# Altium PCB panel.PcbDoc
Units mm, origin at the board's own origin, x right, y up, seen from the top; angles counter-clockwise.
Board outline 201.75 x 192 mm, 4 copper layers (Top Layer - RF, (Inserted) MidLayer2 - GND, (Inserted) MidLayer3 - POWER, Bottom Layer), stack 1.569 mm thick; 3 components, 0 nets, 5 pads, 0 vias.
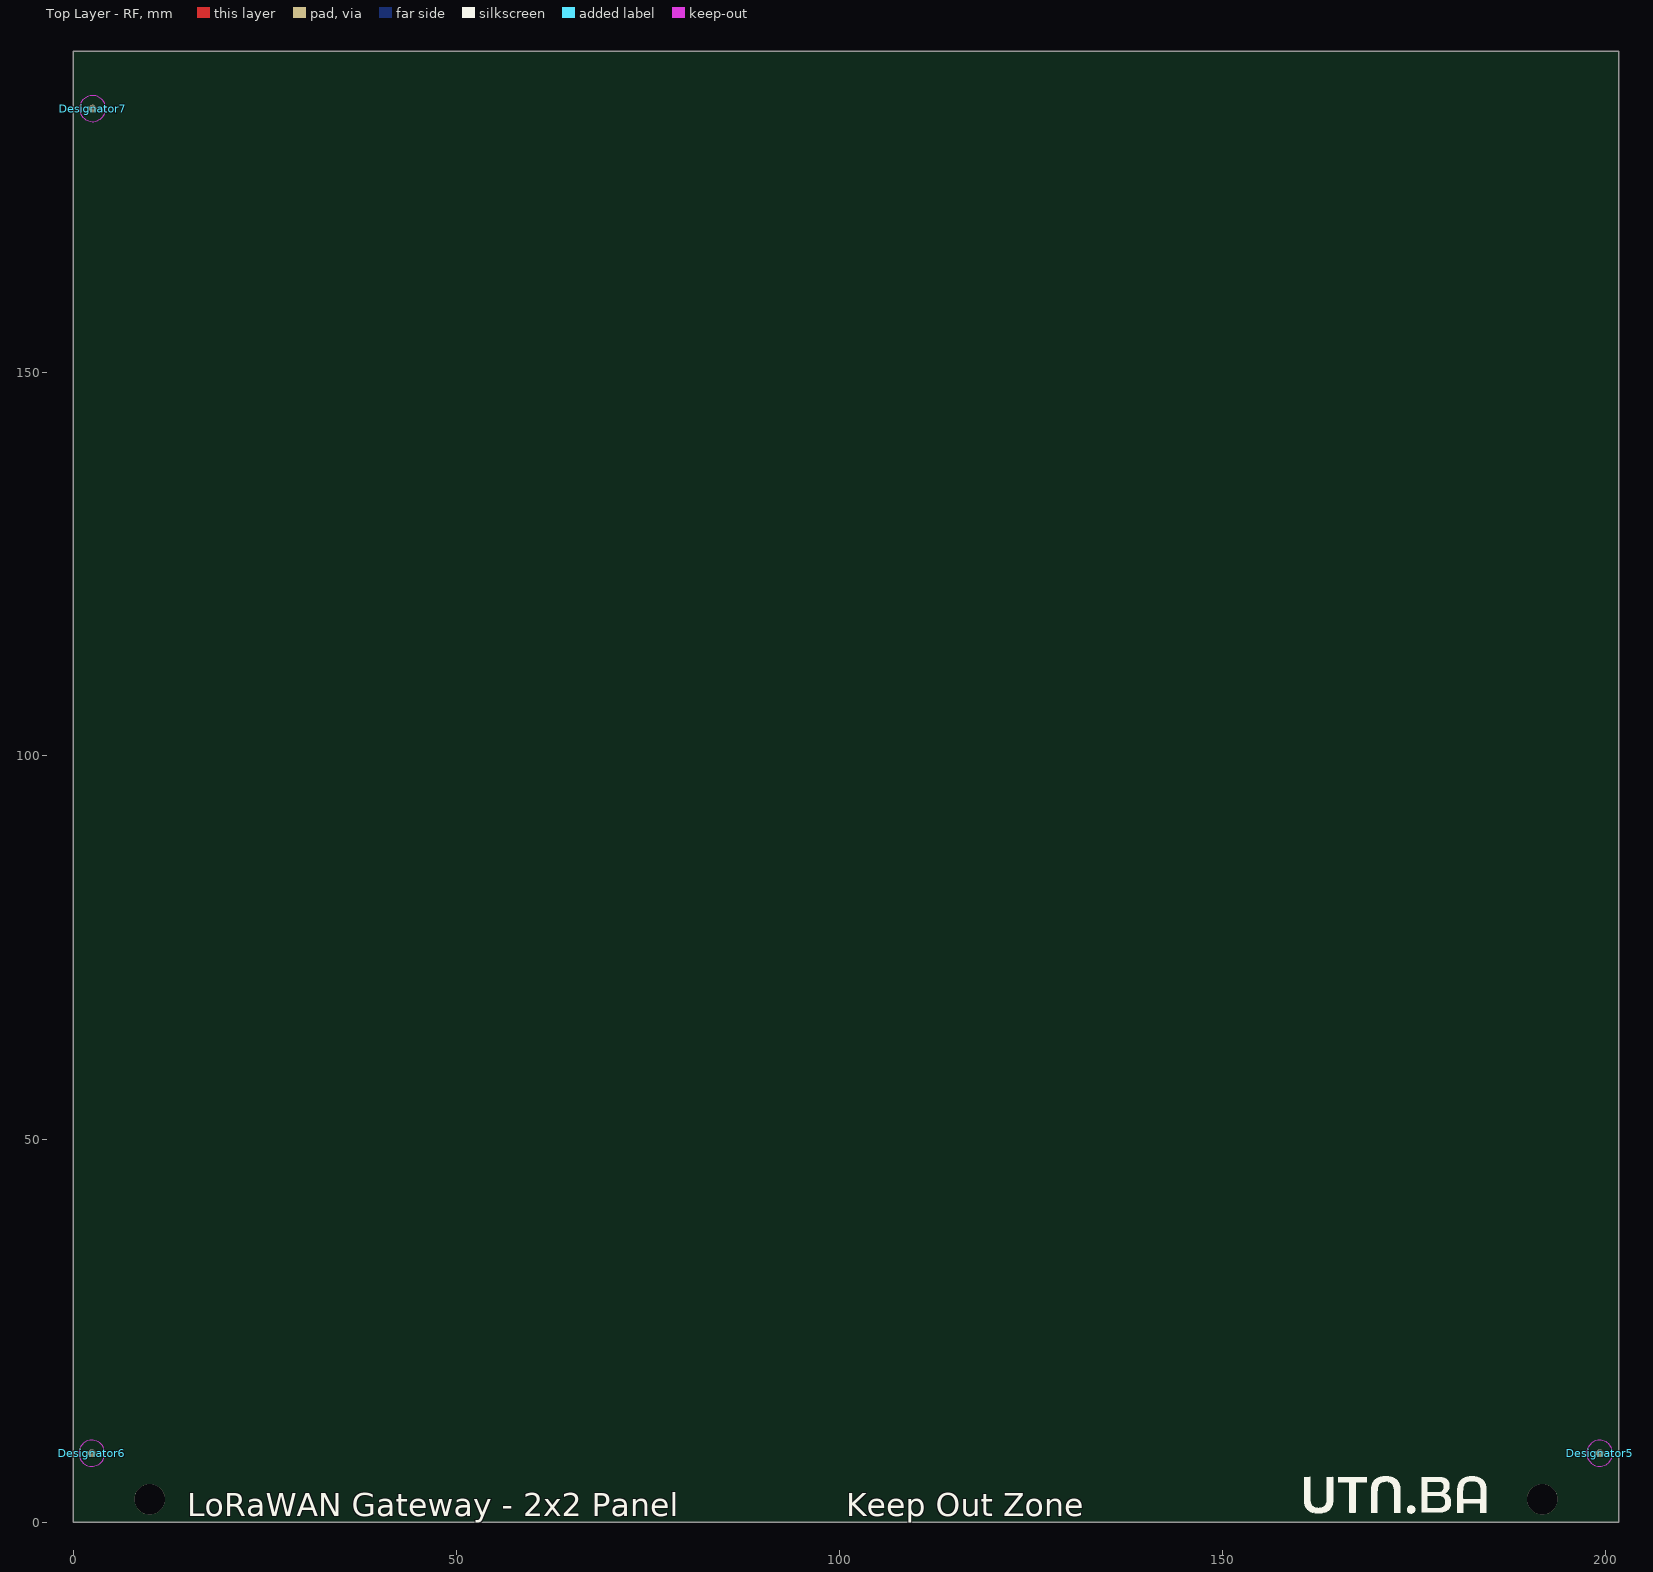
[diagram p0: Top Layer - RF view]
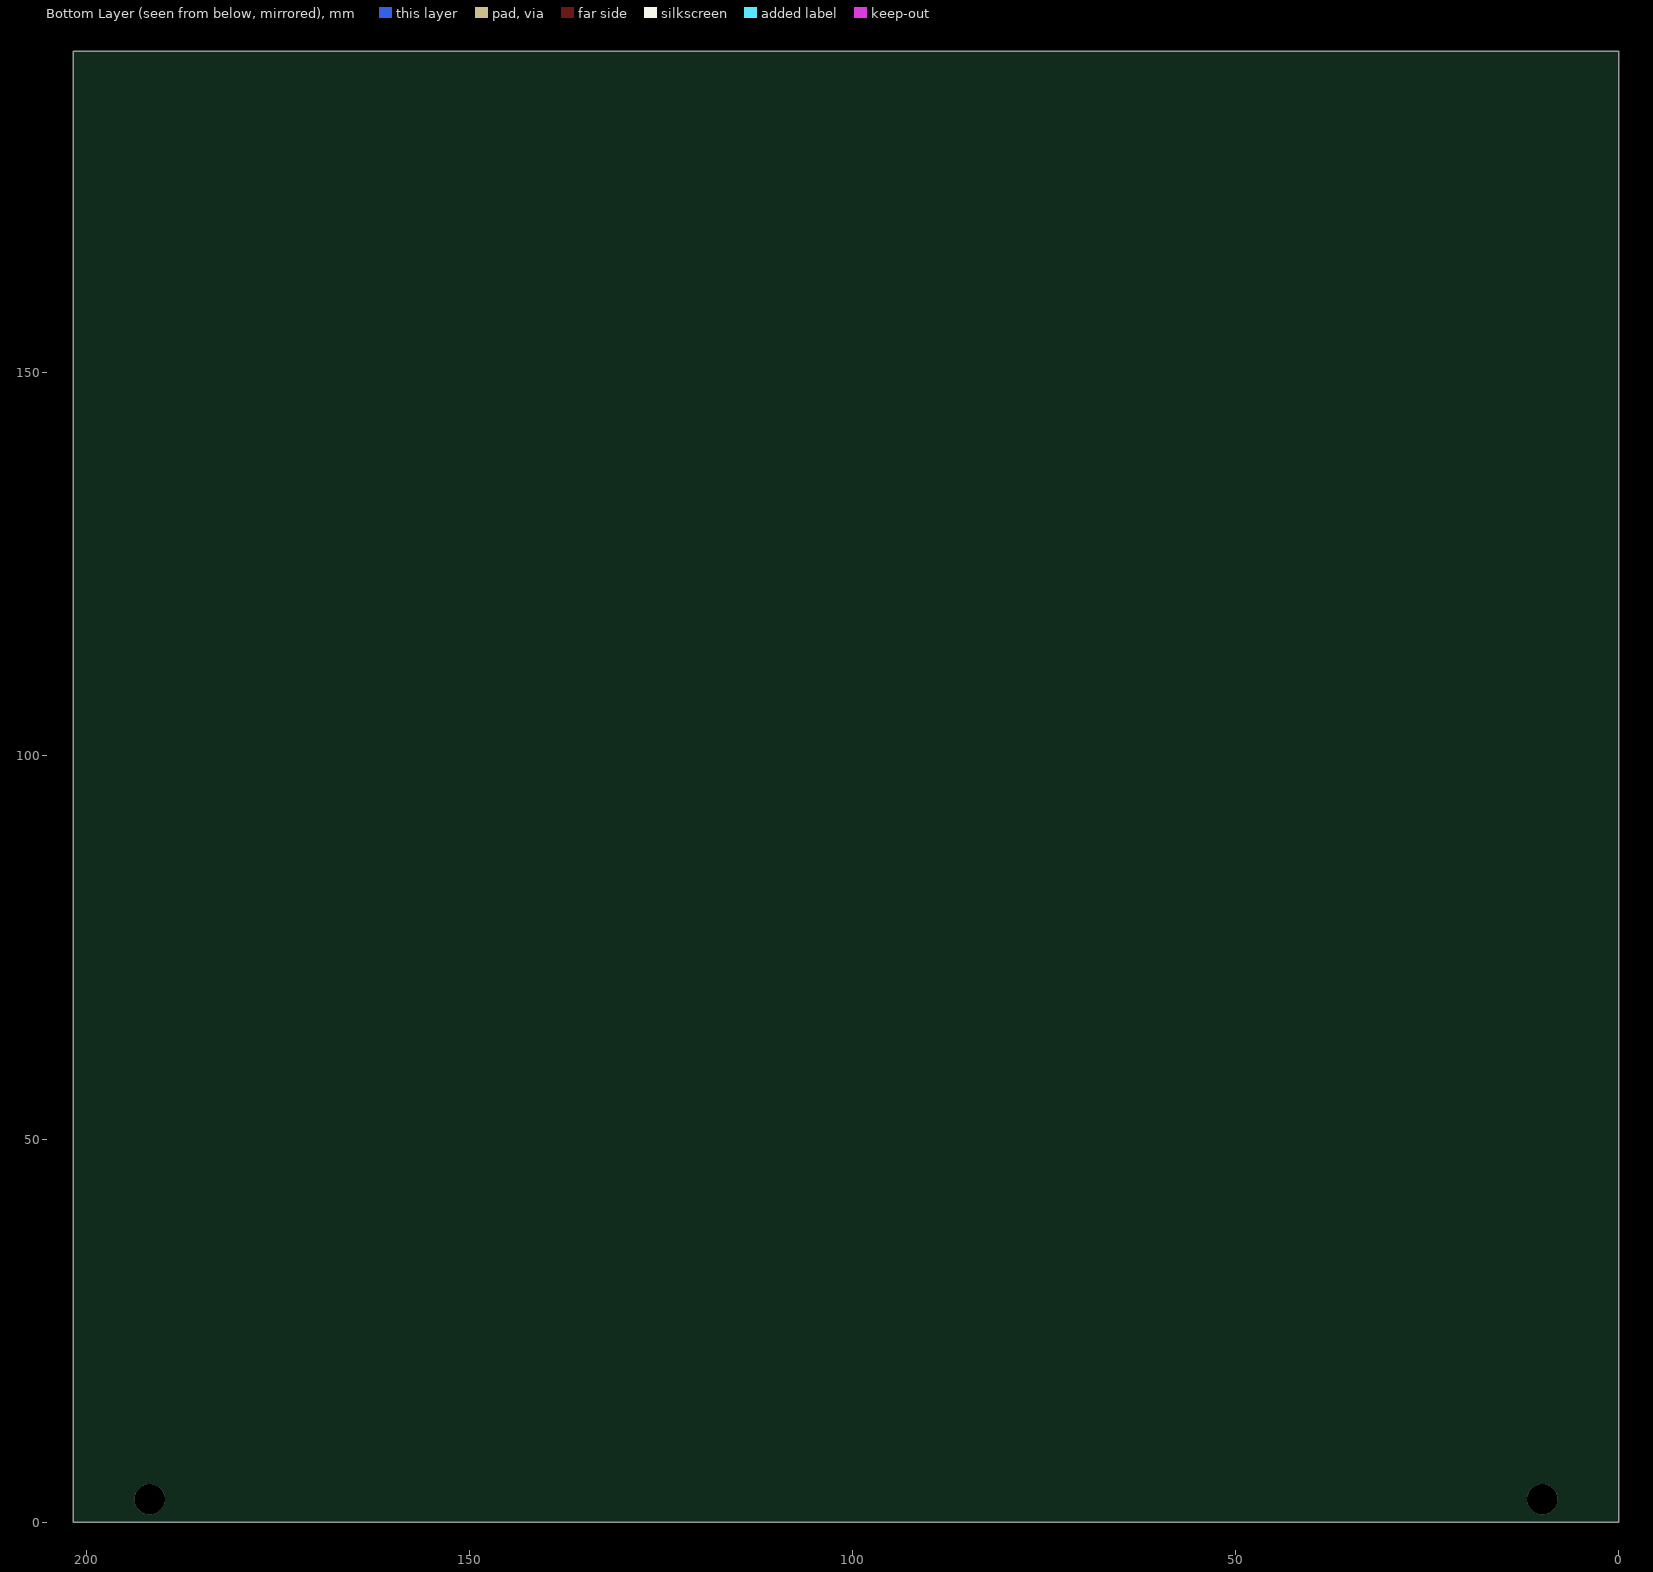
[diagram p1: Bottom Layer view, seen from below]

## Layer stack, top to bottom
Top Solder: solder mask 0.0102, Solder Resist, Dk 3.5
Top Layer - RF: signal copper 0.035
(Inserted) Dielectric 4: prepreg 0.1143, Core-012, Dk 4.5
(Inserted) MidLayer2 - GND: signal copper 0.035
(Inserted) Dielectric 1: prepreg 0.1143, Core-012, Dk 4.5
(Inserted) MidLayer3 - POWER: signal copper 0.0356
Center Dielectric: core 1.2, FR-4, Dk 4.3
Bottom Layer: signal copper 0.035
Bottom Solder: solder mask 0.0102, Solder Resist, Dk 3.5

## Board outline
0,0 201.75,0 201.75,192 0,192

## Design rules (kind name [scope] priority, off if disabled: settings)
Clearance [All] p1: gap=0.254 ignorepadtopadclearanceinfootprint=FALSE except(0: Arc-Hole Track-Hole SMDPad-Hole THPad-Hole Via-Hole Fill-Hole Poly-Hole Region-Hole Text-Hole)
HoleSize [All] p1: absolutevalues=TRUE maxlimit=5 minlimit=0.025 maxpercent=80.000 minpercent=20.000
PolygonConnect [All] p1: connectstyle=Relief reliefconductorwidth=0.254 reliefentries=4 polygonreliefangle="90 Angle" airgapwidth=0.254
RoutingVias [All] p1: holewidth=0.711 width=1.27 viastyle="Through Hole" minholewidth=0.711 minwidth=1.27 maxholewidth=0.711 maxwidth=1.27
SolderMaskExpansion [All] p1: expansion=0.102 istentingtop=FALSE
Width [All] p1: maxlimit=0.254 minlimit=0.254 preferedwidth=0.254
29 further rules are at their usual default settings.

## Components (designator, comment, footprint, x,y, rotation, side; value= is the part's Value field where it differs from the comment)
Designator5 "Comment" FIDUCIAL 199.25,9 r0 top
Designator6 "Comment" FIDUCIAL 2.45,9 r0 top
Designator7 "Comment" FIDUCIAL 2.55,184.5 r180 top

## Footprints (in the part's own frame and the unit in brackets; to place one, negate y for a bottom-side part, rotate by r counter-clockwise, add the part's x,y. Pads: shape width x height; smd on the part's side, far side on the other; paste and mask are expansions set on the pad)
FIDUCIAL [mm] "FIDUCIAL"
  round 1 smd mask+1: ""(0,0)
  Top Layer - RF keep-out circle w0.1: c0,0 r1.7

## Free pads (board coordinates)
  round 4 hole 4 unplated: ""(10,3) ""(191.75,3)

## Nets (pads, with @x,y where several pads share a name; then routed paths per layer and width w, separated by ;. In a path a pad name is that pad's centre, name@x,y a point inside that pad or via, vN(x,y) a via of type N, cw(c..) or ccw(c..) an arc to the next point about the centre after c; other vN are vias at no path point)
pads on no net: Designator5. Designator6. Designator7.

## Silkscreen, mask and mechanical layers (free items; w line width, h text height)
Top Overlay:
  drawing of 6 lines, arcs and shapes, not listed
  text "LoRaWAN Gateway - 2x2 Panel" at 14.9,0.8 h3
  text "Keep Out Zone" at 100.9,0.8 h3
V Cut:
  lines w0.254: 0,6.5 201.75,6.5 ; 0,96.7 201.75,96.7 ; 0,187 201.75,187 ; 5,0 5,192 ; 100.9,192 100.9,0 ; 196.75,0 196.75,192
Board Shape:
  the board outline again, w0.254

## Dimensions
2.5,184.5 to 0,192 on Dimensions
2.55,184.5 to 0,187 on Dimensions
199.25,9 to 201.75,0 on Dimensions
199.25,9 to 201.75,6.5 on Dimensions
0,0 to 10,3 on Dimensions
0,0 to 10,3 on Dimensions
0,187 to 0,192 on Dimensions
0,0 to 0,192 on Dimensions
0,6.5 to 0,96.7 on Dimensions
5,0 to 100.9,0 on Dimensions
196.75,0 to 201.75,0 on Dimensions
0,0 to 0,6.5 on Dimensions
0,0 to 201.75,0 on Dimensions
0,0 to 5,0 on Dimensions

## Panel: embedded boards
"pci_104.PcbDoc" at 196.75,187, 2 rows x 1 columns, spacing 90.2 x 38.1, rotation 180
"pci_104.PcbDoc" at 5,6.525, 2 rows x 1 columns, spacing 90.2 x 38.1, rotation 0